# Altium PCB Yusynth VCA.PcbDoc
Units mil, origin at the board's own origin, x right, y up, seen from the top; angles counter-clockwise.
Board outline 1496.06 x 1732.28 mil, 2 copper layers (Top Layer, Bottom Layer), stack 65.792 mil thick; 56 components, 34 nets, 136 pads, 86 vias.
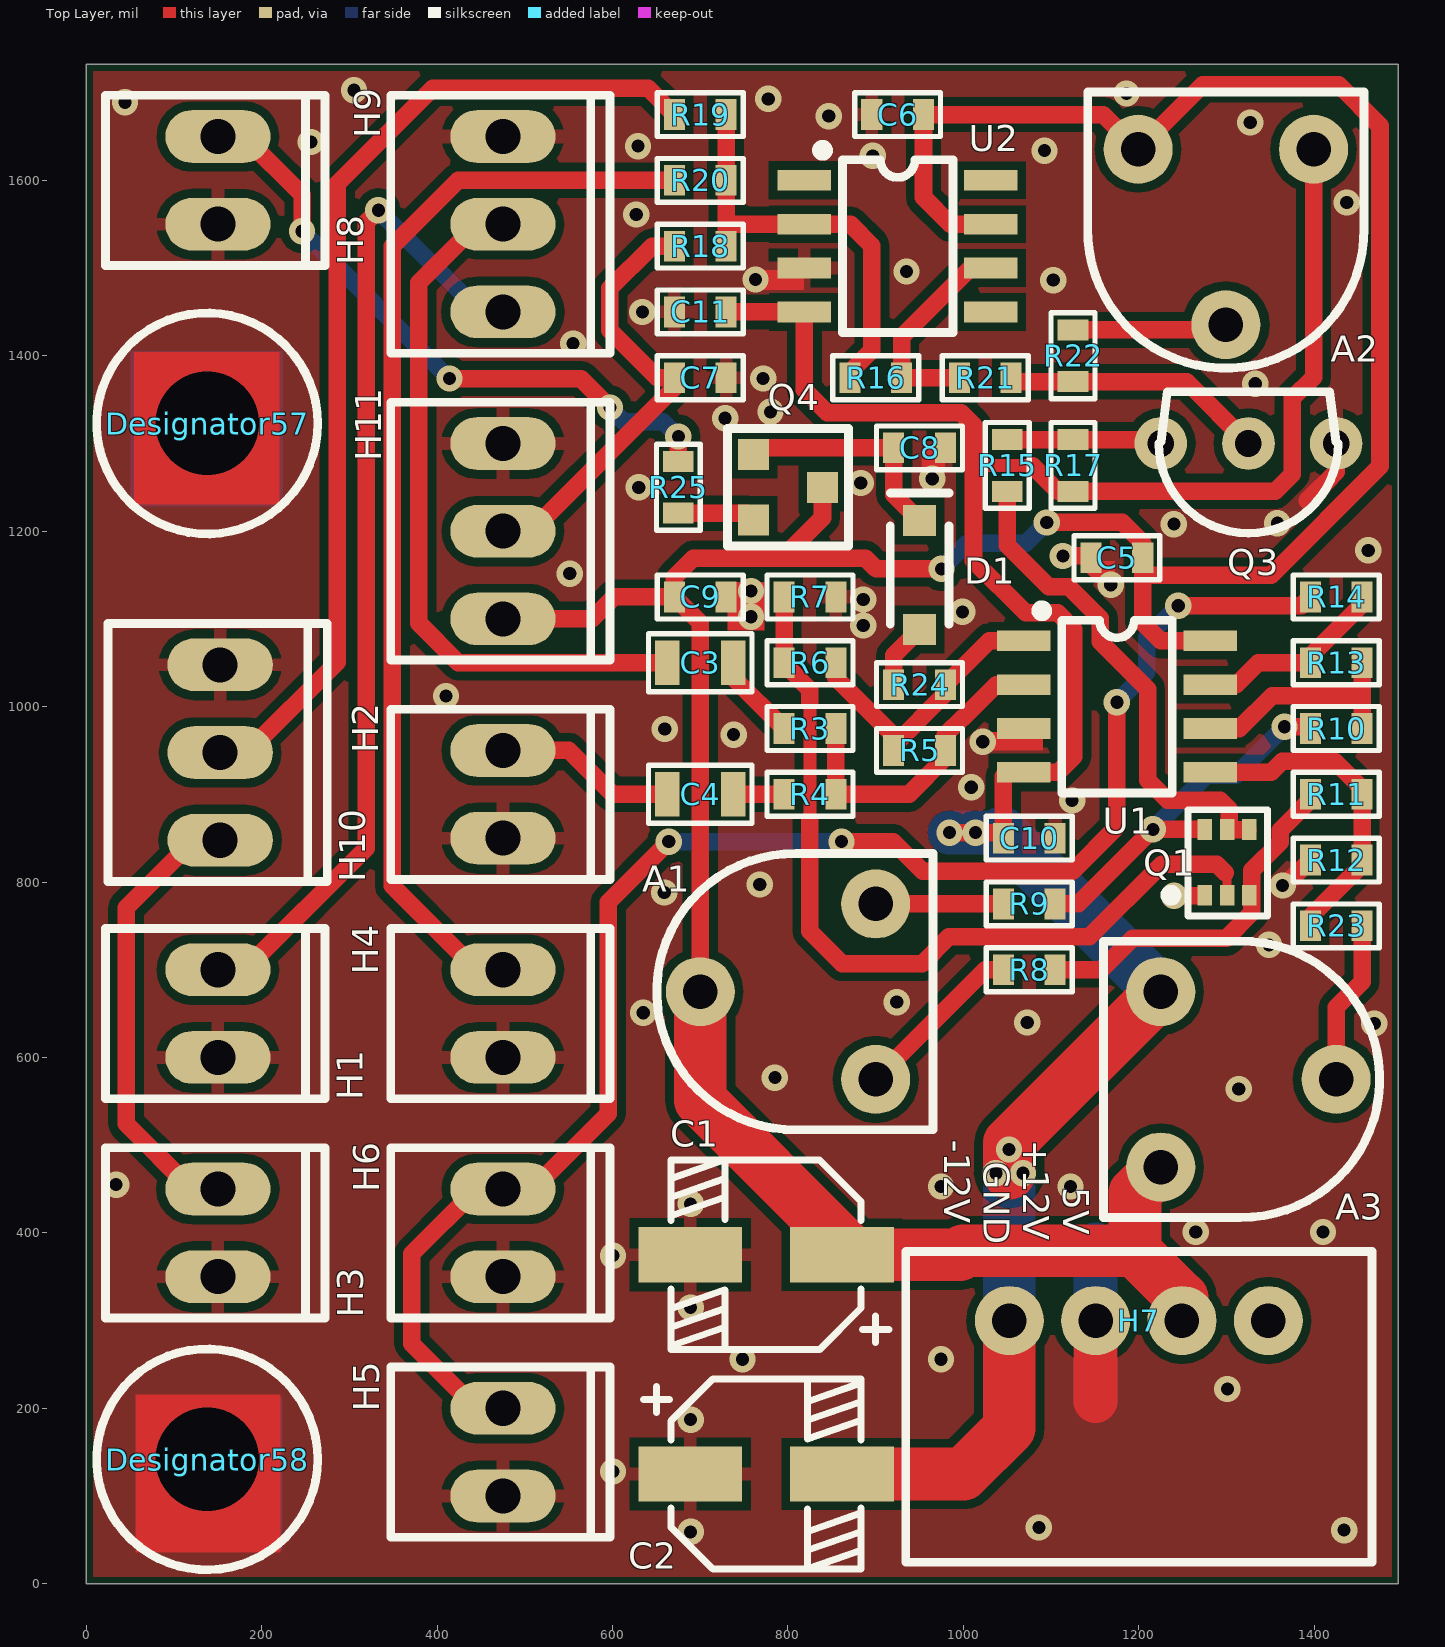
[diagram p0: Top Layer view]
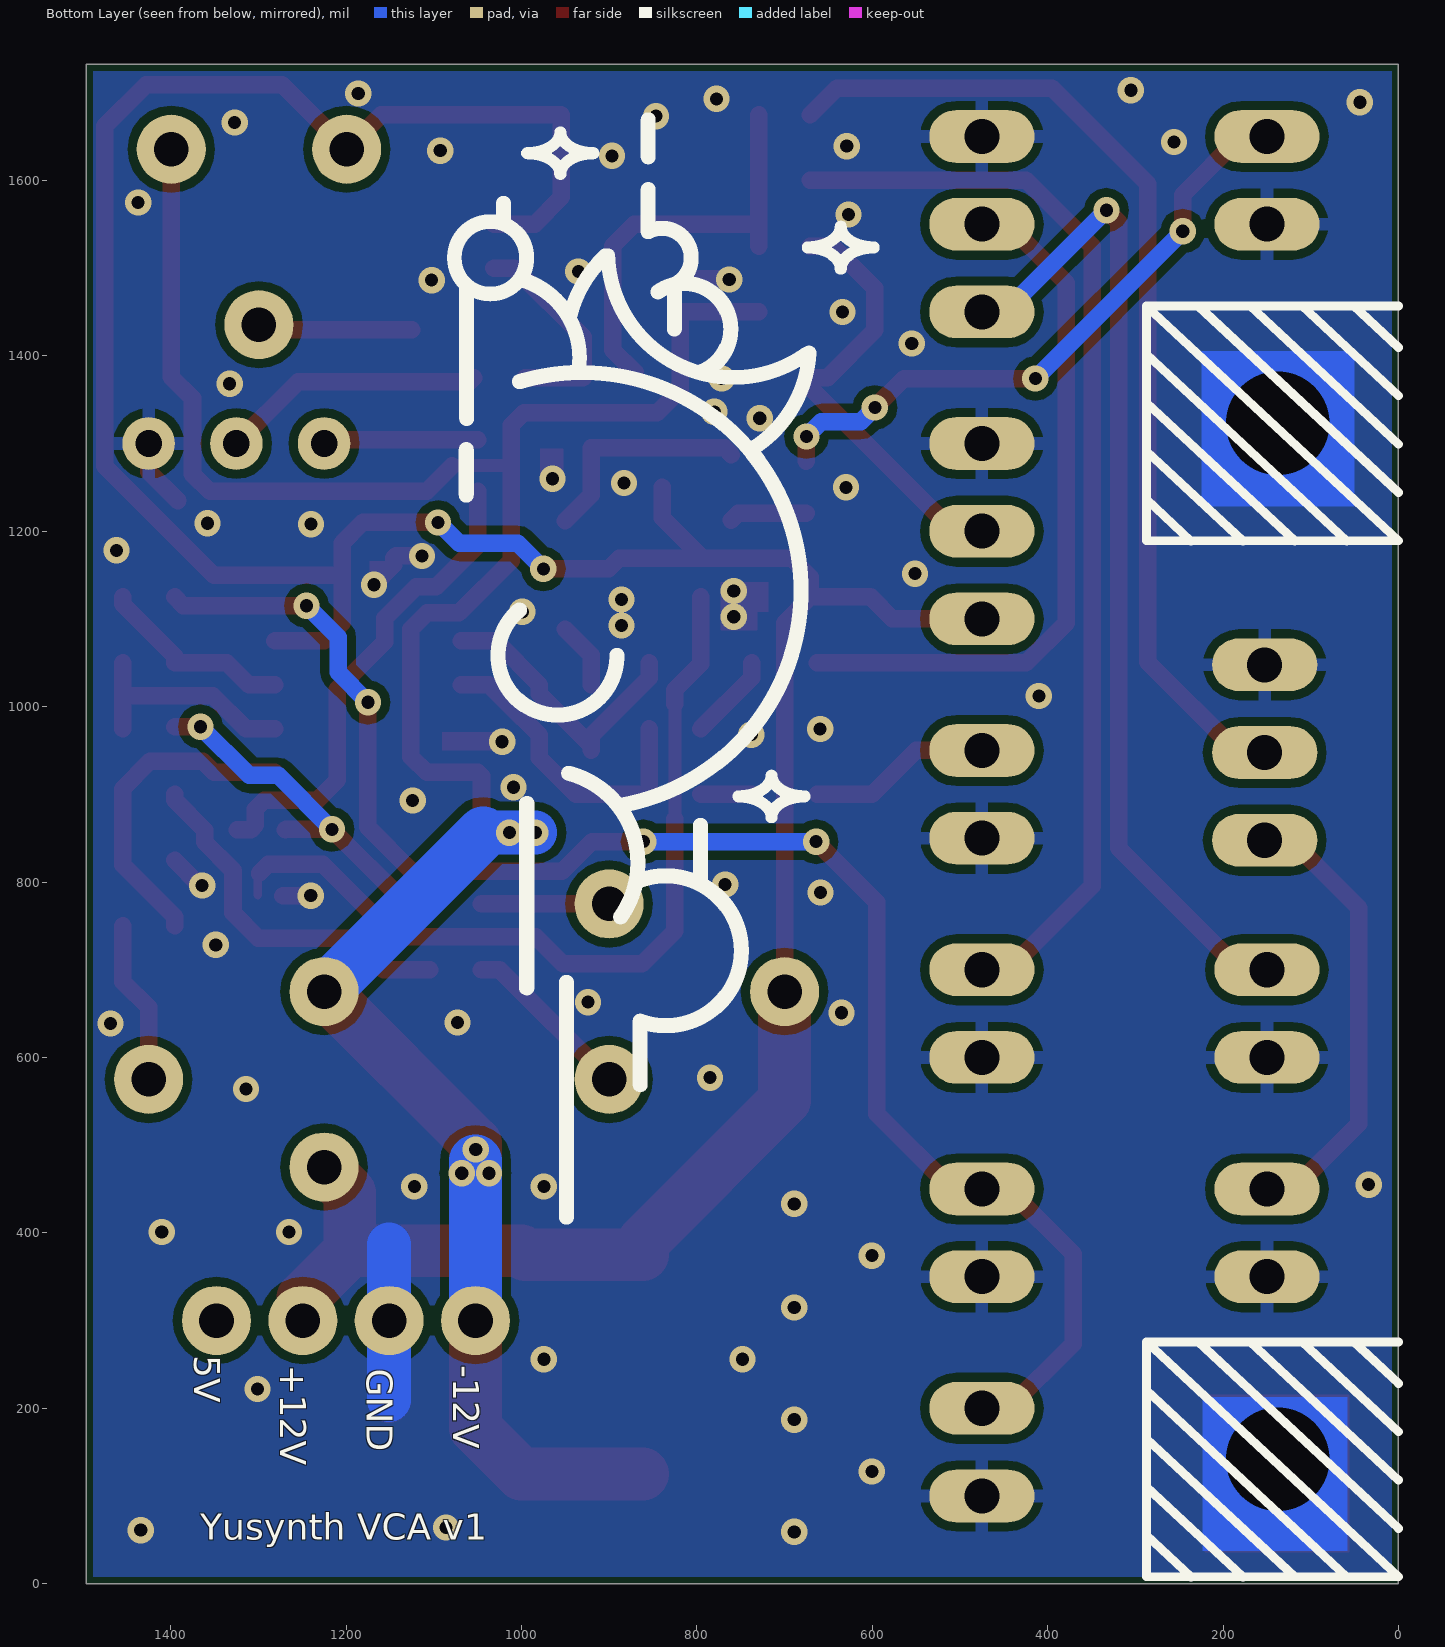
[diagram p1: Bottom Layer view, seen from below]

## Layer stack, top to bottom
Top Solder: solder mask 0.4, Solder Resist, Dk 3.5
Top Layer: signal copper 1.4
Dielectric 1: dielectric 62.9921, FR-4, Dk 4.8
Bottom Layer: signal copper 1.4
Bottom Solder: solder mask 0.4, Solder Resist, Dk 3.5

## Board outline
0,0 0,1732.28 1496.06,1732.28 1496.06,0

## Design rules (kind name [scope] priority, off if disabled: settings)
Clearance [All] p1: gap=10 except(5: SMDPad-SMDPad)
Height [All] p1: minheight=0 maxheight=39370.08 prefheight=500
HoleSize [All] p1: absolutevalues=TRUE maxlimit=1000 minlimit=1 maxpercent=80.000 minpercent=20.000
PolygonConnect PolygonConnect_1 [IsVia AND InNet('GND')] p1: connectstyle=Direct reliefconductorwidth=10 reliefentries=4 polygonreliefangle="90 Angle" airgapwidth=10
PolygonConnect [All] p2: connectstyle=Relief reliefconductorwidth=15 reliefentries=4 polygonreliefangle="90 Angle" airgapwidth=10
RoutingVias [All] p1: holewidth=15 width=30 viastyle="Through Hole" minholewidth=10 minwidth=20 maxholewidth=28 maxwidth=50
SilkToSolderMaskClearance [IsPad] p1: minsilkscreentomaskgap=1 clearancetoexposedcopper=TRUE
SolderMaskExpansion [All] p1: expansion=4
Width [All] p1: maxlimit=100 minlimit=10 preferedwidth=20 minimp=50.000000 maximp=50.000000 favimp=50.000000
27 further rules are at their usual default settings.

## Components (designator, comment, footprint, x,y, rotation, side; value= is the part's Value field where it differs from the comment)
A1 "1k" "trim pot" 800,675 r90 top
A2 "47k" "trim pot" 1299.21,1535.43 r180 top
A3 "100k" "trim pot" 1325,575 r270 top
C1 "22uF" "C - Wurth - SMT - 5mm Dia can" 775,375 r270 top
C2 "22uF" "C - Wurth - SMT - 5mm Dia can" 775,125 r90 top
C3 "10u" "JEDEC - 0805" 700,1050 r0 top
C4 "10u" "JEDEC - 0805" 700,900 r0 top
C5 "100nF" "JEDEC - 0603" 1175,1169.69 r0 top
C6 "100nF" "JEDEC - 0603" 925,1675 r0 top
C7 "100nF" "JEDEC - 0603" 700,1375 r180 top
C8 "100nF" "JEDEC - 0603" 950,1295 r0 top
C9 "100nF" "JEDEC - 0603" 700,1125 r0 top
C10 "100nF" "JEDEC - 0603" 1075,850 r0 top
C11 "100nF" "JEDEC - 0603" 700,1450 r180 top
D1 "1N4148" "SOD 123" 950,1150 r90 top
Designator57 "Comment" "Bracket 4-40" 137.8,1322.83 r270 top
Designator58 "Comment" "Bracket 4-40" 137.8,141.73 r270 top
H1 "1x2 TH Male" "H - KK 100 - TH - 1x2" 150,650 r270 top
H2 "1x2 TH Male" "H - KK 100 - TH - 1x2" 475,900 r270 top
H3 "1x2 TH Male" "H - KK 100 - TH - 1x2" 150,400 r270 top
H4 "1x2 TH Male" "H - KK 100 - TH - 1x2" 475,650 r270 top
H5 "1x2 TH Male" "H - KK 100 - TH - 1x2" 475,150 r270 top
H6 "1x2 TH Male" "H - KK 100 - TH - 1x2" 475,400 r270 top
H7 "Synth Power" "Power Connector 3" 1200,300 r180 top
H8 "1x2 TH Male" "H - KK 100 - TH - 1x2" 150,1600 r270 top
H9 "1x3 TH Male" "H - KK 100 - TH - 1x3" 475,1550 r270 top
H10 "1x3 TH Male" "H - KK 100 - TH - 1x3" 152.56,947.64 r270 top
H11 "1x3 TH Male" "H - KK 100 - TH - 1x3" 475,1200 r270 top
Q1 "DMMT3904W" "Diodes Inc - SOT363" 1275,785 r90 top
Q3 "BC547C" "TO 92 - ON SEMI" 1325,1300 r180 top
Q4 "MMBT3904" "SOT 23" 800,1250 r270 top
R3 "100k" "JEDEC - 0603" 825,975 r0 top
R4 "100k" "JEDEC - 0603" 825,900 r0 top
R5 "100k" "JEDEC - 0603" 950,950 r180 top
R6 "100k" "JEDEC - 0603" 825,1050 r180 top
R7 "1k" "JEDEC - 0603" 825,1125 r180 top
R8 "15k" "JEDEC - 0603" 1075,700 r180 top
R9 "15k" "JEDEC - 0603" 1075,775 r180 top
R10 "10k" "JEDEC - 0603" 1425,975 r0 top
R11 "10k" "JEDEC - 0603" 1425,900 r0 top
R12 "100k" "JEDEC - 0603" 1425,825 r0 top
R13 "100k" "JEDEC - 0603" 1425,1050 r180 top
R14 "470R" "JEDEC - 0603" 1425,1125 r180 top
R15 "33k" "JEDEC - 0603" 1050,1275 r270 top
R16 "100k" "JEDEC - 0603" 900,1375 r0 top
R17 "15k" "JEDEC - 0603" 1125,1275 r90 top
R18 "100k" "JEDEC - 0603" 700,1525 r0 top
R19 "68k" "JEDEC - 0603" 700,1675 r0 top
R20 "68k" "JEDEC - 0603" 700,1600 r0 top
R21 "22k" "JEDEC - 0603" 1025,1375 r0 top
R22 "22k" "JEDEC - 0603" 1125,1400 r270 top
R23 "470k" "JEDEC - 0603" 1425,750 r180 top
R24 "12k" "JEDEC - 0603" 950,1025 r180 top
R25 "470R" "JEDEC - 0603" 675,1250 r90 top
U1 "TL072" "TI - D (R-PDSO-G8)"#1 1175,1000 r0 top
U2 "741" "TI - D (R-PDSO-G8)"#2 925,1525 r0 top

## Footprints (in the part's own frame and the unit in brackets; to place one, negate y for a bottom-side part, rotate by r counter-clockwise, add the part's x,y. Pads: shape width x height; smd on the part's side, far side on the other; paste and mask are expansions set on the pad)
"Bracket 4-40" [mil] "Bolt: (McMaster, 91772A349) Bracket: (Keystone, 621)"
  round 60 hole 118.11: 0(0,0)
  silkscreen extent -126,-126 126,126, body extent -125,-295 125,139, height 80
"C - Wurth - SMT - 5mm Dia can" [mm] "732-8432-1-ND"
  rect 1.6x3 smd mask+0.05: 1(0,2.2) 2(0,-2.2)
  silkscreen extent -2.75,-2.75 2.75,3.56, body extent -2.75,-2.75 2.75,2.75, height 5.5
"Diodes Inc - SOT363" [mm]
  rect 0.6x0.42 smd mask+0: 1(0,0) 2(0,-0.65) 3(0,-1.3) 4(1.9,-1.3) 5(1.9,-0.65) 6(1.9,0)
  silkscreen extent -0.6,-1.83 2.47,1.12
"H - KK 100 - TH - 1x2" [mil] "WM4200-ND"
  oval 60x120 hole 40: 1(-50,0) 2(50,0)
  silkscreen extent -97,-128 97,122, body extent -97,-128 97,122, height 422
"H - KK 100 - TH - 1x3" [mil] "WM4201-ND"
  oval 60x120 hole 40: 1(-100,0) 2(0,0) 3(100,0)
  silkscreen extent -147,-128 147,122, body extent -147,-128 147,122, height 422
"JEDEC - 0603" [mil]
  rect 24x35 smd: 1(-29.5,0) 2(29.5,0)
  silkscreen extent -49,-25 49,25, body extent -31,-16 32,16
"JEDEC - 0805" [mil]
  rect 28x51 smd: 1(-37.5,0) 2(37.5,0)
  silkscreen extent -59,-33 59,33, body extent -39,-25 39,24, height 20
"Power Connector 3" [mm]
  round 2 hole 1: 1(-3.75,0) 2(-1.25,0) 3(1.25,0) 4(3.75,0)
  silkscreen extent -6.75,-2 6.75,7, body extent -6.27,-1.55 6.23,6.65, height 4.2
"SOD 123" [mm]
  rect 0.9x0.95 smd: 1(-1.575,0) 2(1.575,0)
  silkscreen extent -1.43,-0.85 2.37,0.85
"SOT 23" [mm] "From On Semi MMBT3904"
  rect 0.9x0.9 smd: 1(-0.95,-1) 2(0.95,-1) 3(0,1)
  silkscreen extent -1.7,-1.75 1.7,1.75
"TI - D (R-PDSO-G8)"#1 [mm] "http://www.ti.com/lit/ml/mpds348/mpds348.pdf"
  rect 1.55x0.6 smd paste-0.05 mask+0.07: 1(-2.7,1.905) 2(-2.7,0.635) 3(-2.7,-0.635) 4(-2.7,-1.905) 5(2.7,-1.905) 6(2.7,-0.635) 7(2.7,0.635) 8(2.7,1.905)
  silkscreen extent -2.32,-2.5 1.6,2.92
"TI - D (R-PDSO-G8)"#2 [mm] "http://www.ti.com/lit/ml/mpds348/mpds348.pdf"
  rect 1.55x0.6 smd paste-0.05: 1(-2.7,1.905) 2(-2.7,0.635) 3(-2.7,-0.635) 4(-2.7,-1.905) 5(2.7,-1.905) 6(2.7,-0.635) 7(2.7,0.635) 8(2.7,1.905)
  silkscreen extent -2.32,-2.5 1.6,2.92
"TO 92 - ON SEMI" [mil] "BC547CTACT-ND"
  round 60 hole 30.32: 1(-100,0) 2(0,0) 3(100,0)
  silkscreen extent -102,-59 102,102, body extent -102,-59 102,102, height 345
"trim pot" [mm]
  round 2 hole 1: 1(-2.54,-2.54) 2(0,2.54) 3(2.54,-2.54)
  silkscreen extent -4,-4.2 4,3.8

## Part data
A1 A2 A3: library part "pot - trim - random eBay", "trim pot from the random eBay set"
C1 C2: library part "c - 22uF 25V Alum SMT", "CAP 22 UF 20% 25 V"
C3 C4: library part "c - 10uF 35V 0805", "CAP CER 10UF 35V X5R 0805"
C5 C6 C7 C8 C9 C10 C11: library part "c - 100nF", "CAP CER 0.1UF 50V X7R 0603"
D1: library part "Diode - 1N4148 - SOD123", "DIODE GEN PURP 75V 250MA SOD123"
H1 H2 H3 H4 H5 H6 H8: library part "Header - KK 6373 - 1x2", "CONN HEADER 2POS .100 VERT TIN"
H7: library part "h - Power - 1x4", "CONN HEADER EH SIDE 6POS 2.5MM"
H9 H10 H11: library part "Header - KK 6373 - 1x3", "CONN HEADER 3POS .100 VERT TIN"
Q1: library part "tran - matched npn - DMMT3904W", "TRANS 2NPN 40V 0.2A SOT363"
Q3: library part "t - BJT - npn - BC547C", "TRANS NPN 45V 0.1A TO-92"
Q4: library part "t - BJT - npn - MMBT3904", "TRANS NPN 40V 0.2A SOT23"
R3 R4 R5 R6 R12 R13 R16 R18: library part "5 - 100K 5% 0603", "RES SMD 100K OHM 5% 1/10W 0603"
R7: library part "3 - 1.0K 5% 0603", "RES SMD 1K OHM 5% 1/10W 0603"
R8 R9 R17: library part "4 - 15K 5% 0603", "RES SMD 15K OHM 5% 1/10W 0603"
R10 R11: library part "4 - 10K 5% 0603", "RES SMD 10K OHM 5% 1/10W 0603"
R14 R25: library part "2 - 470R 5% 0603", "RES SMD 470 OHM 5% 1/10W 0603"
R15: library part "4 - 33K 5% 0603", "RES SMD 33K OHM 5% 1/10W 0603"
R19 R20: library part "4 - 68K 5% 0603", "RES SMD 68K OHM 5% 1/10W 0603"
R21 R22: library part "4 - 22K 5% 0603", "RES SMD 22K OHM 5% 1/10W 0603"
R23: library part "5 - 470K 5% 0603", "RES SMD 470K OHM 5% 1/10W 0603"
R24: library part "4 - 12K 5% 0603", "RES SMD 12K OHM 5% 1/10W 0603"
U1: library part "op amp - TL072", "IC OPAMP JFET 3MHZ 8SOIC"
U2: library part "op amp - UA741 - TI UA741CDR", "IC OPAMP GP 1MHZ 8SOIC"

## Via types
v1: diameter 30, hole 15, Top Layer to Bottom Layer, tented both sides, 86 vias

## Nets (pads, with @x,y where several pads share a name; then routed paths per layer and width w, separated by ;. In a path a pad name is that pad's centre, name@x,y a point inside that pad or via, vN(x,y) a via of type N, cw(c..) or ccw(c..) an arc to the next point about the centre after c; other vN are vias at no path point)
+12V: A1.2 A2.3 A3.3 C1.1 C5.2 C6.2 C9.1 H7.2 H11.3 Q4.3 U1.8 U2.7 | length 3939.4
  Top Layer w20: H11.3 577,1100 602,1125 C9.1 ; A1.2 700,1095.5 C9.1 ; Q4.3 839.37,1215.37 793,1169 ; v1(975,1157) 900.37,1157 888.37,1169 793,1169 ; U2.7 985,1550 954.5,1580.5 C6.2 1159.65,1675 A2.3 1272.78,1709 1428,1709 1475,1662 1475,1274 1351,1150 1204.5,1150 ; v1(1095,1210) 1181,1210 1204.5,1186.5 1204.5,1150 ; U1.8 1225,1075 1204.5,1095.5 1204.5,1150 ; C9.1 670.5,1147.5 692,1169 793,1169
  Top Layer w60: A1.2 700,551 861.61,389.39 C1.1 995.63,375 1000,379.37 1195.63,379.37 ; A3.3 1195.63,445.63 1195.63,379.37 ; H7.2 1249.21,325.79 1195.63,379.37
  Bottom Layer w20: v1(975,1157) 1004,1186 1071,1186 v1(1095,1210)
-12V: A2.1 A3.1 C2.2 C10.1 C11.1 H7.4 R17.1 U1.4 U2.4 | length 2934.1
  Top Layer w15: 1011.5,1275 1078.28,1275 1078.78,1274.5
  Top Layer w20: C11.1 U2.4 818.7,1361.3 845,1335 997.28,1335 1011.5,1320.78 1011.5,1275 1011.5,1166.5 1071.19,1106.81 1107.5,1106.81 1126,1088.31 1126,943 1108,925 U1.4 1050,925 1045.5,920.5 C10.1 1039.2,856.3 v1(984.25,856.3) ; 1078.78,1274.5 1107.78,1245.5 R17.1 1355.5,1245.5 1375,1265 1375,1351.38 1399.21,1375.59 A2.1
  Top Layer w60: C2.2 1000,125 1052.36,177.36 H7.4 ; 1052.36,468 1052.36,502.36 A3.1
  Bottom Layer w50: v1(984.25,856.3) v1(1013.78,856.3) 1043.7,856.3
  Bottom Layer w60: 1043.7,856.3 A3.1 ; H7.4 v1@1052.36,482.28
  other v1: 1037,468 1068,468 1052,495
GND: C1.2 C2.1 C5.1 C6.1 C7.1 C8.2 C9.2 C10.2 C11.2 Designator57.0 Designator58.0 H1.2 H2.2 H3.2 H4.2 H5.2 H6.2 H7.3 H8.2 H9.1 H10.1 H11.1 Q1.1 Q3.1 R7.1 R12.1 U1.3 U2.3 | length 496.4
  Top Layer w20: v1(1113.38,1171.81) 1143.37,1171.81 C5.1 1145.5,1161.5 v1(1168,1139) ; v1(1240.16,784.45) Q1.1@1272,784.45 ; v1(1364,796) 1366.5,796 R12.1 ; 1392,1235 1425,1268 Q3.1
  Top Layer w50: 1150.79,208.21 H7.3
  Bottom Layer w50: 1150.79,209.21 H7.3 1150.79,386.79
  other v1: 688.98,59.06 1434.06,61.02 1086,64 600.39,127.95 688.98,187.01 1301,222 748.03,255.91 974.41,255.91 688.98,314.96 600.39,374.02 1265,401 1410,401 688.98,433.07 974.41,452.76 1122.05,452.76 34,455 1313.98,563.98 785,577 1468.5,638.78 1072.83,639.76 635,651 924,663 1348.43,728.35 659,788 767.72,797.24 1124,893 1009,908 1022,960 738,968 659.45,974.41 410,1012 885.83,1092.52 757.87,1102.36 999,1108 885.83,1122.05 757.87,1131.89 551.18,1151.57 1461.61,1178.15 1240,1208 1358,1209 629.92,1250 883,1255 964.57,1259.84 728.35,1328.74 780,1336 1332.68,1368.11 771.65,1374.02 555,1414 634,1450 1102.36,1486.22 763,1487 935.04,1496.06 626.97,1561.02 1437.01,1574.8 896.65,1627.95 1092.52,1633.86 629,1639 255.91,1643.7 1327,1666 846.46,1673.23 44,1689 777.56,1692.91 1186,1699 305.12,1702.76
NetA1_1: A1.1 R8.2 | length 197.3
  Top Layer w20: A1.1 1025,700 R8.2
NetA1_3: A1.3 R9.2 | length 145.5
  Top Layer w20: A1.3 R9.2
NetA2_2: A2.2 R22.1 | length 176.7
  Top Layer w20: R22.1 1293.28,1429.5 A2.2
NetA3_2: A3.2 R23.1 | length 187.2
  Top Layer w20: A3.2 1425,657 1454.5,686.5 R23.1
NetC3_1: C3.1 H9.2 | length 813.9
  Top Layer w20: H9.2 445.67,1550 379,1483.33 379,1095.29 424.29,1050 C3.1
NetC3_2: C3.2 R3.1 | length 99
  Top Layer w20: C3.2 737.5,1033 R3.1
NetC4_1: C4.1 H2.1 | length 208.2
  Top Layer w20: H2.1 550,950 600,900 C4.1
NetC4_2: C4.2 R4.1 | length 58
  Top Layer w20: C4.2 R4.1
NetC7_2: C7.2 H11.2 R18.1 | length 512
  Top Layer w20: H11.2 507,1200 670.5,1363.5 C7.2 651,1375 597,1429 597,1477 645,1525 R18.1
NetC8_1: C8.1 D1.2 Q4.1 | length 258.2
  Top Layer w20: Q4.1 768.23,1295 C8.1 920.5,1241.51 D1.2
NetD1_1: D1.1 R24.2 | length 75.2
  Top Layer w20: R24.2 920.5,1058.49 D1.1
NetH1_1: H1.1 H9.3 | length 1149.6
  Top Layer w20: H1.1 180.32,700 318.99,838.68 318.99,1551.99 v1(333,1566)
  Bottom Layer w20: v1(333,1566) 449,1450 H9.3
NetH3_1: H3.1 H10.3 | length 520.9
  Top Layer w20: H3.1 119.88,450 45.28,524.61 45.28,770.67 122.24,847.64 H10.3
NetH4_1: H4.1 R20.1 | length 1247.3
  Top Layer w20: H4.1 444.69,700 349,795.69 349,1524.71 424.29,1600 R20.1
NetH5_1: H5.1 H6.1 R14.2 | length 1847.2
  Top Layer w20: H5.1 444.69,200 371,273.69 371,375.92 445.08,450 H6.1 509,450 595,536 595,777 v1(664,846) ; v1(861,846) 920,846 953.5,812.5 1124.78,812.5 1175,862.72 v1(1175,1005) ; v1(1245,1115) 1385.5,1115 R14.2
  Bottom Layer w20: v1(664,846) v1(861,846) ; v1(1175,1005) 1209,1039 1209,1079 v1(1245,1115)
NetH8_1: H8.1 R25.2 | length 719.6
  Top Layer w20: H8.1 179.72,1650 246,1583.72 v1(246,1542) ; v1(414,1374) 564,1374 v1(597,1341) ; R25.2 v1(675,1308)
  Bottom Layer w20: v1(246,1542) v1(414,1374) ; v1(597,1341) 613,1325 658,1325 v1(675,1308)
NetH10_2: H10.2 R19.1 | length 1163.5
  Top Layer w20: H10.2 182.87,947.64 286,1050.76 286,1596 395,1705 640.5,1705 R19.1
NetQ1_2: Q1.2 R6.2 R7.2 | length 959.3
  Top Layer w10: Q1.2 1300.59,808.39
  Top Layer w15: 825,871.72 825,1003.28 ; 1298.49,810.49 1300.59,808.39
  Top Layer w20: R7.2 R6.2 795.5,1048.86 825,1019.36 825,1003.28 ; 825,871.72 825,744 862,707 953,707 983.5,737.5 1143.71,737.5 1226.41,820.2 1288.79,820.2 1298.49,810.49
NetQ1_3: Q1.3 R8.1 R11.1 | length 413.9
  Top Layer w20: R8.1 1157,700 1193,736 1299.95,736 1328.86,764.9 1328.86,813.11 1361,845.25 1361,859 1395.5,893.5 R11.1
NetQ1_4: Q1.4 Q1.5 R15.2 | length 557
  Top Layer w20: R15.2 1050,1184 1097.19,1136.81 1119.92,1136.81 1156,1100.73 1156,1074 1210,1020 1210,916 1233,893 1293,893 1303.27,882.73 1303.27,864.54 1308,859.8 Q1.4@1324,859.8
NetQ1_6: Q1.6 R9.1 R10.1 | length 427.8
  Top Layer w20: R9.1 1131,775 v1(1216,860) 1268.8,860 Q1.6@1269,859.8 ; v1(1366,977) R10.1@1395.5,977
  Bottom Layer w20: v1(1216,860) 1277.47,921.47 1310.47,921.47 v1(1366,977)
NetQ3_2: Q3.2 R21.2 R22.2 | length 301.6
  Top Layer w20: R21.2 1059,1370.5 R22.2 1254.5,1370.5 Q3.2
NetQ3_3: Q3.3 R15.1 R17.2 | length 176.9
  Top Layer w20: R15.1 R17.2 1220.5,1304.5 Q3.3
NetQ4_2: Q4.2 R25.1 | length 88.9
  Top Layer w20: R25.1 752.73,1220.5 Q4.2
NetR3_2: R3.2 R4.2 R5.1 U1.2 | length 356.5
  Top Layer w20: R3.2 R4.2 938,900 979.5,941.5 R5.1 979.5,968 999,987.5 999.78,987.5 1037.28,1025 U1.2
NetR5_2: R5.2 R6.1 R24.1 U1.1 | length 336.7
  Top Layer w20: R6.1 854.5,1032.78 920.5,966.78 R5.2 920.5,955.5 979.5,1014.5 R24.1 1029.5,1075 U1.1
NetR10_2: R10.2 R13.1 U1.6 | length 263.7
  Top Layer w20: U1.6 1314.5,975 1352,1012.5 1454.5,1012.5 ; R10.2 1454.5,1012.5 ; R13.1 1454.5,1012.5
NetR11_2: R11.2 R12.2 R23.2 U1.5 | length 372.2
  Top Layer w20: U1.5 1351,925 1363.5,937.5 1423.5,937.5 1454.5,906.5 R11.2 R12.2 1454.5,819.5 1395.5,760.5 R23.2
NetR13_2: R13.2 R14.1 U1.7 | length 224
  Top Layer w20: U1.7 1311,1025 1336,1050 R13.2 1395.5,1057.5 1454.5,1116.5 R14.1
NetR16_1: R16.1 R18.2 R19.2 R20.2 U2.2 | length 487.3
  Top Layer w20: R18.2 729.5,1550 ; R19.2 R20.2 729.5,1550 ; R16.1 870.5,1381.33 895.67,1406.5 895.67,1525.59 871.26,1550 U2.2 729.5,1550
NetR16_2: R16.2 R21.1 U2.6 | length 246.9
  Top Layer w20: R21.1 R16.2 929.5,1421.63 1007.87,1500 U2.6
pads on no net: H7.1 U2.1 U2.5 U2.8

## Polygon pours and split planes (outlines as drawn)
GND on Top Layer "TopGnd" (solid, remove dead copper, pour order 0): 7.87,1724.41 1488.19,1724.41 1488.19,7.87 7.87,7.87
GND on Bottom Layer "BottomGnd" (solid, remove dead copper, pour order 2): 7.87,1724.41 1488.19,1724.41 1488.19,7.87 7.87,7.87

## Other copper
Top Layer:
  rectangle net GND: 56.1,35.43 221.46,215.55
  rectangle net GND: 54.13,1230.31 220.47,1404.53
  rectangle net GND: 1021,950 1090.67,971
  rectangle net GND: 718,1108 773,1142
  rectangle net GND: 731,1087 773,1108
  rectangle net GND: 771,1475 818,1498
  rectangle net GND: 952,1260 979,1294
  rectangle net GND: 1155,1149 1173,1166
Bottom Layer:
  rectangle net GND: 50.2,1228.35 224.41,1405.51
  rectangle net GND: 58.07,37.4 223.43,212.6

## Silkscreen, mask and mechanical layers (free items; w line width, h text height)
Bottom Overlay:
  drawing of 9 lines, arcs and shapes, not listed
  text "Yusynth VCA v1" at 1366,50 h30
Mechanical 1:
  the board outline again, w10
Mechanical 3:
  lines w10: 160.43,360.24 475,674.8 475,700 ; 166.34,617.13 475,925.79 475,950 ; 475,208.27 475,350
  text "Component placement: 25mil" at 1597,1616 h30

## Dimensions
0,1732.28 to 0,0 on Mechanical 3
0,1732.28 to 1496.06,1732.28 on Mechanical 3
137.8,1322.83 to 137.8,141.73 on Mechanical 3

## Text inside footprints (layer, text, board x,y; h text height)
H7: Top Overlay "GND" at 1022.99,480.99 h30 r270; Top Overlay "-12V" at 977.99,505.99 h30 r270; Top Overlay "+12V" at 1067.99,505.99 h30 r270; Top Overlay "5V" at 1113.99,451.99 h30 r270; Bottom Overlay "-12V" at 1077.95,248.82 h30 r90; Bottom Overlay "GND" at 1176.38,244.88 h30 r90; Bottom Overlay "+12V" at 1274.8,249.8 h30 r90; Bottom Overlay "5V" at 1373.23,260.63 h30 r90